# Altium PCB PCB1.PcbDoc
Units mil, origin at the board's own origin, x right, y up, seen from the top; angles counter-clockwise.
Board outline 4850 x 3985 mil, 2 copper layers (Top Layer, Bottom Layer); 38 components, 38 nets, 150 pads, 6 vias.
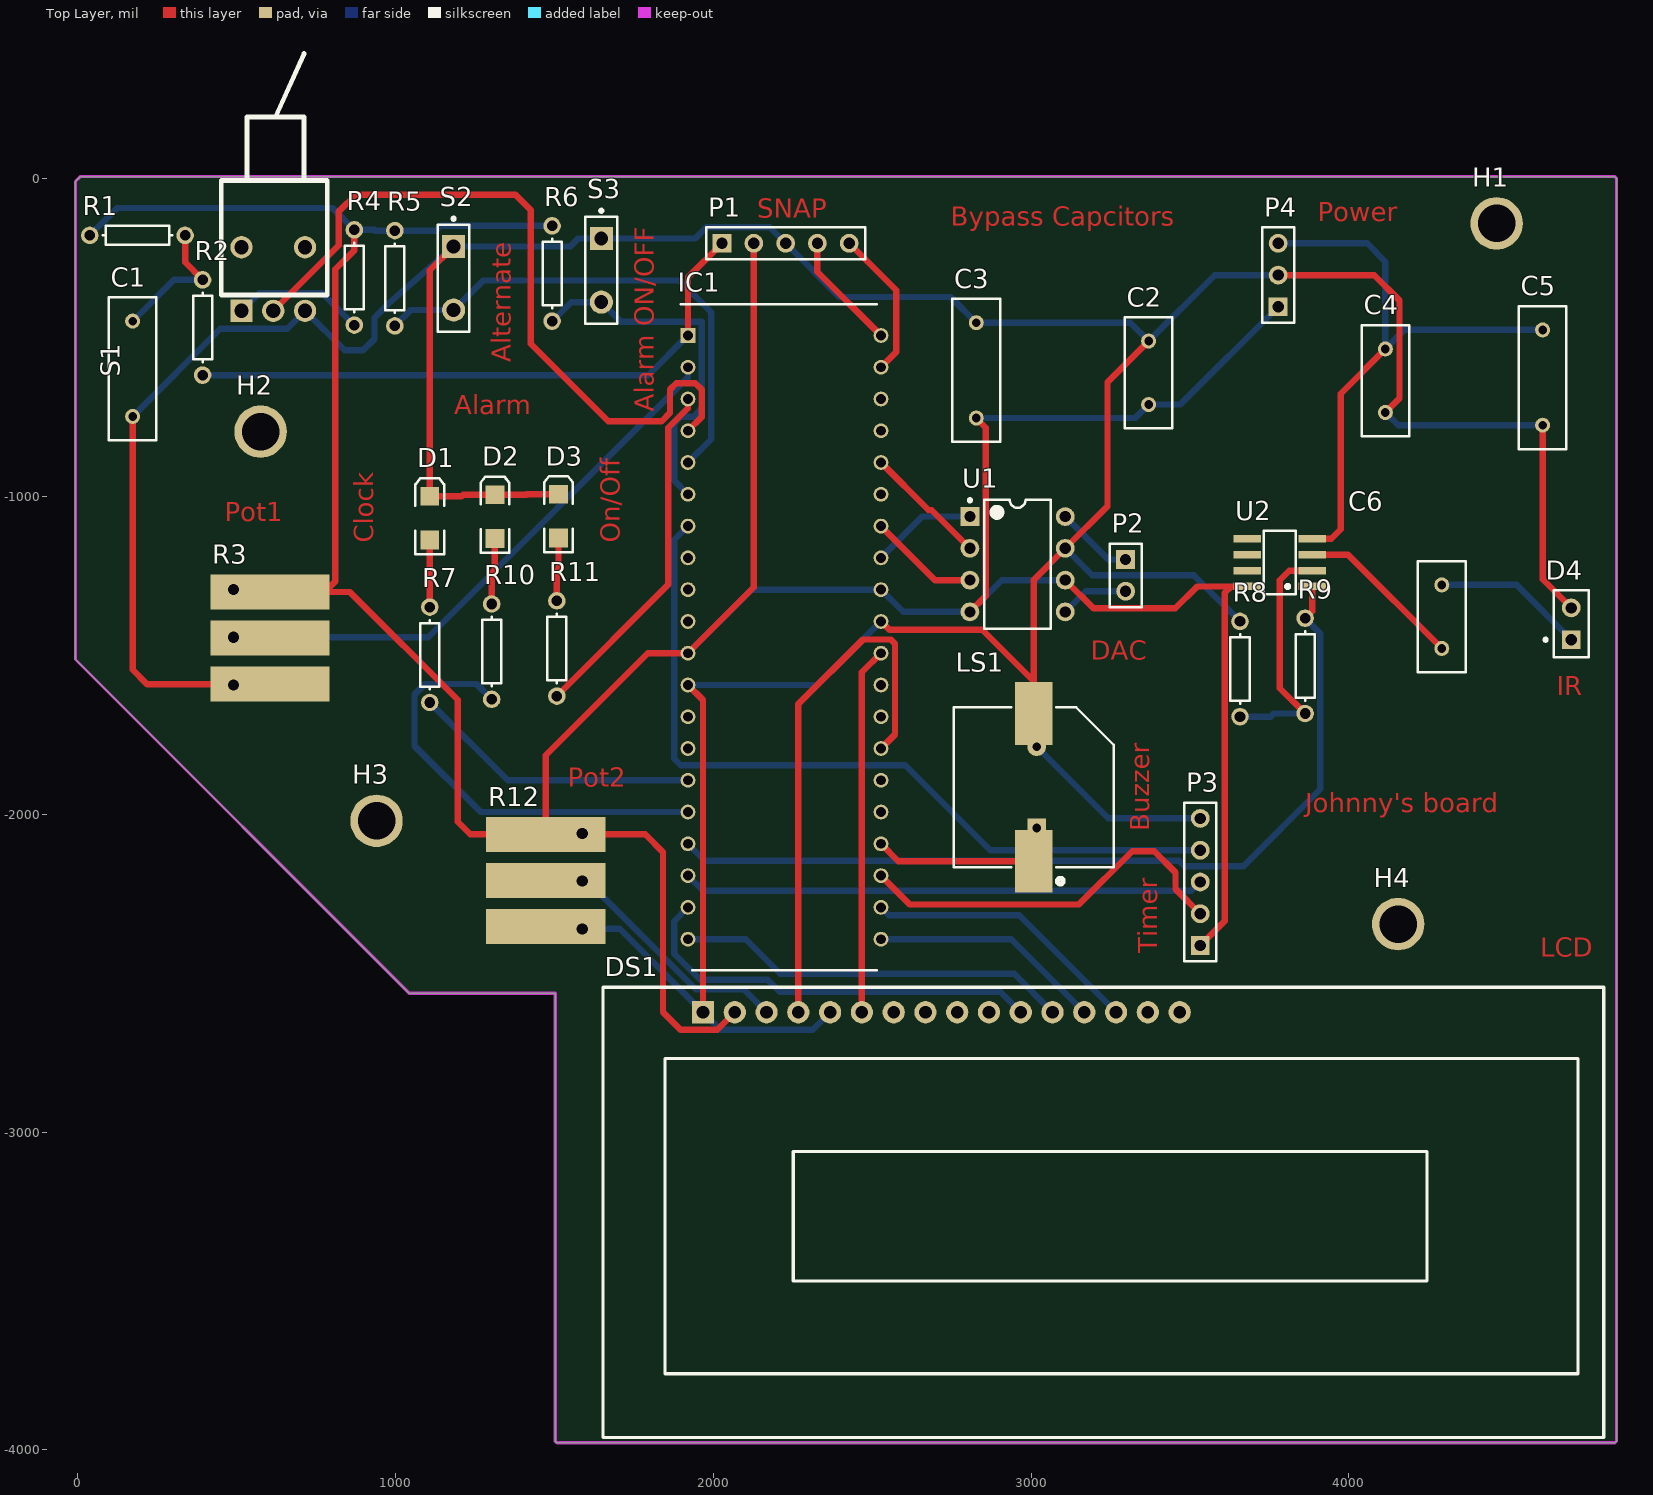
[diagram p0: Top Layer view]
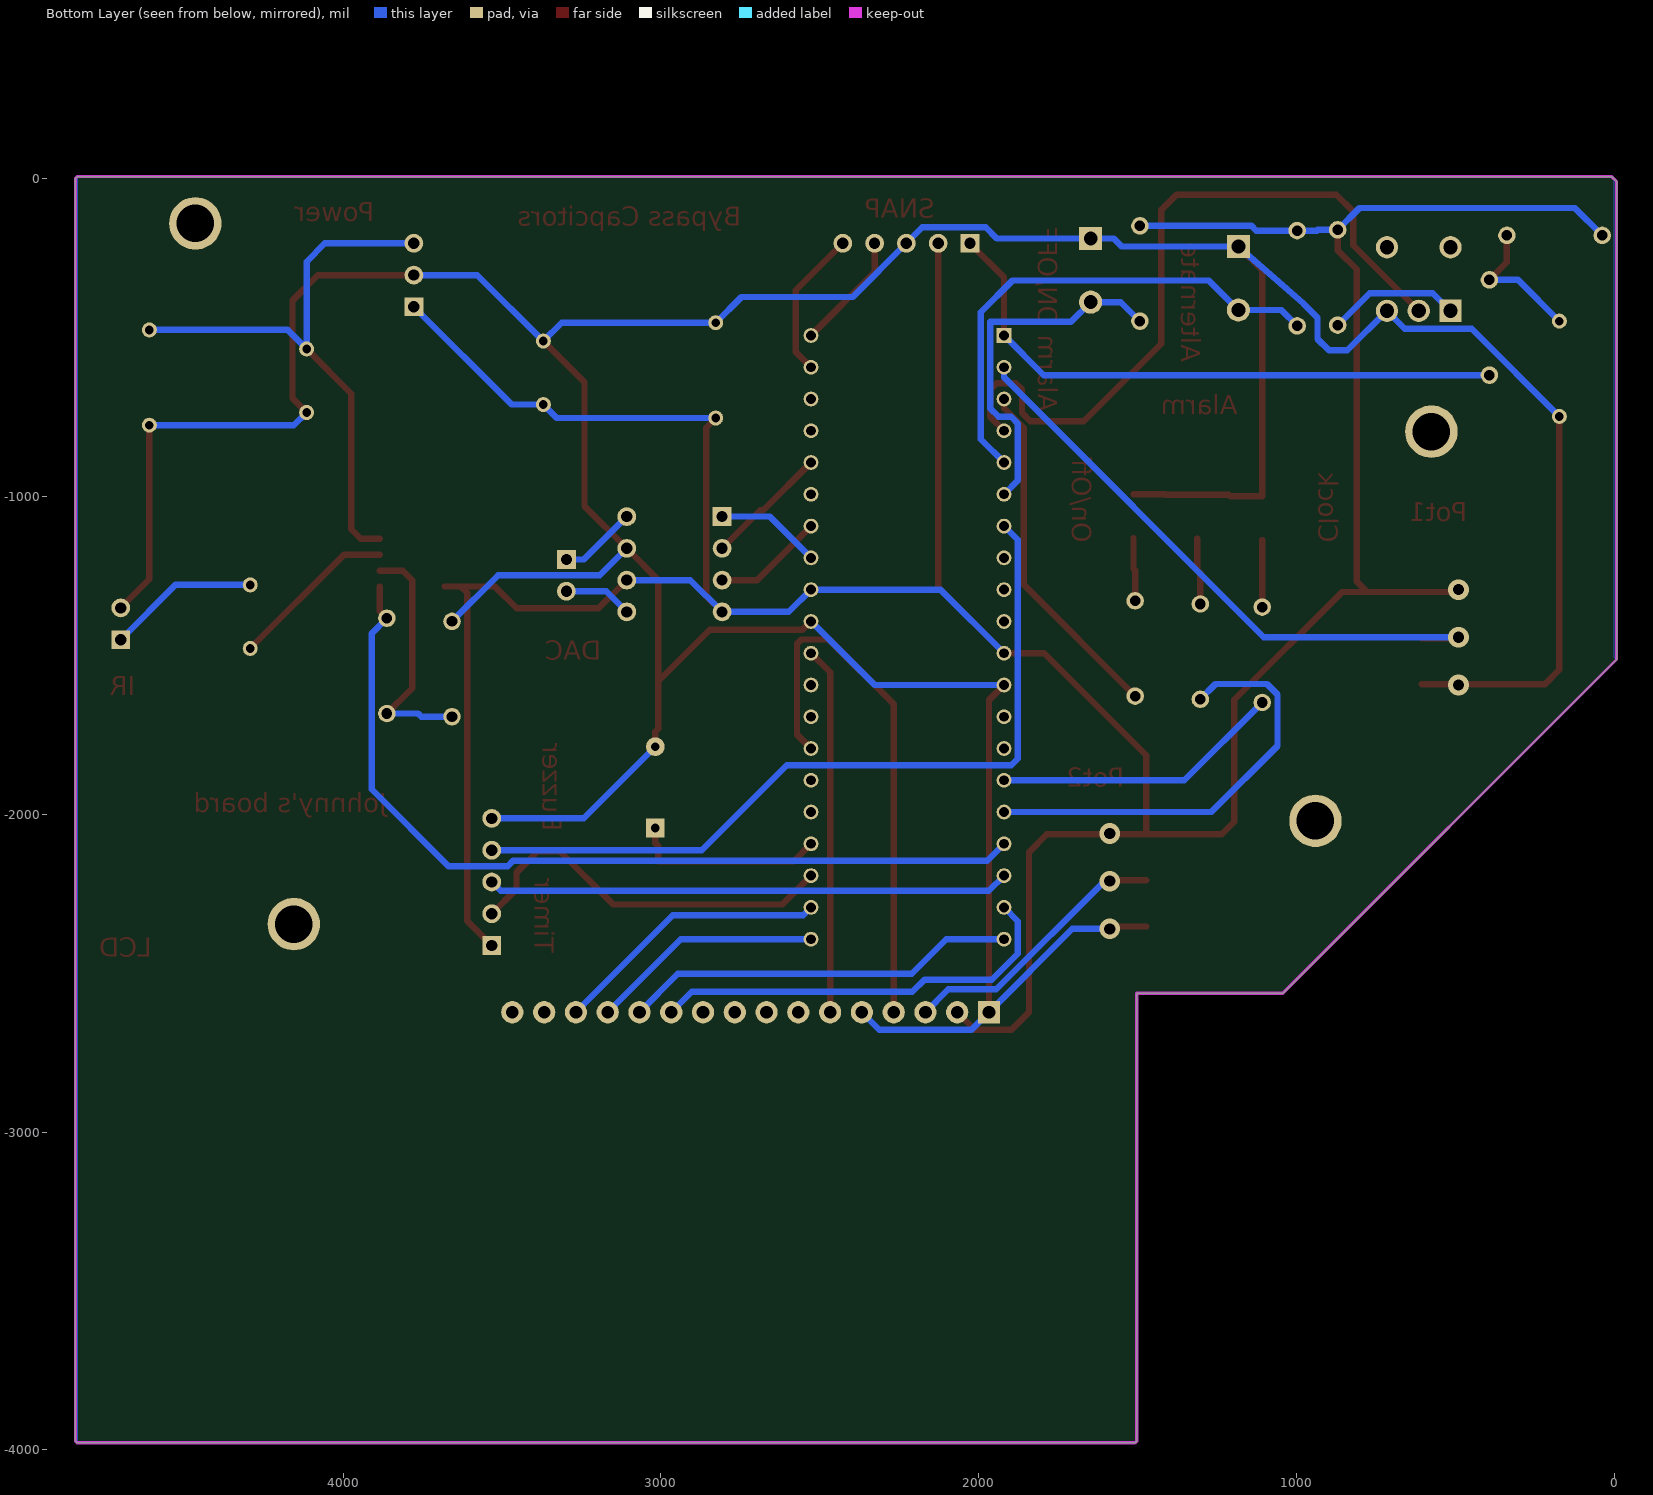
[diagram p1: Bottom Layer view, seen from below]

## Layer stack, top to bottom
Top Solder: solder mask 0.4, Solder Resist, Dk 3.5
Top Layer: signal copper 1.4
Dielectric 1: dielectric 12.6, FR-4, Dk 4.8
Bottom Layer: signal copper 1.4
Bottom Solder: solder mask 0.4, Solder Resist, Dk 3.5

## Board outline
1042.5,-2562.5 -7.5,-1512.5 -7.5,-7.5 7.5,7.5 4837.5,7.5 4842.5,2.5 4842.5,-3972.5 4837.5,-3977.5 1507.5,-3977.5 1502.5,-3972.5 1502.5,-2562.5

## Design rules (kind name [scope] priority, off if disabled: settings)
Clearance [All] p1: gap=10 ignorepadtopadclearanceinfootprint=FALSE except(0: Arc-Hole Track-Hole SMDPad-Hole THPad-Hole Via-Hole Fill-Hole Poly-Hole Region-Hole Text-Hole)
ComponentClearance [All] p1: gap=10 collisioncheckmode=3 verticalgap=0 showdistances=FALSE
PolygonConnect [All] p1: connectstyle=Relief reliefconductorwidth=10 reliefentries=4 polygonreliefangle="90 Angle" airgapwidth=10
RoutingVias [All] p1: holewidth=28 width=50 viastyle="Through Hole" minholewidth=28 minwidth=50 maxholewidth=28 maxwidth=50
SolderMaskExpansion [All] p1: expansion=4 istentingtop=FALSE
Width [All] p1: maxlimit=25 minlimit=10 preferedwidth=20 minimp=50.000000 maximp=50.000000 favimp=50.000000
29 further rules are at their usual default settings.

## Components (designator, comment, footprint, x,y, rotation, side; value= is the part's Value field where it differs from the comment)
C1 "Cap" RAD-0.3 172.5,-597.5 r90 top value=0.1uF
C2 "Cap Pol1" RAD-0.2 3370,-610 r90 top value=100uF
C3 "Cap" RAD-0.3 2827.5,-602.5 r270 top value=100nF
C4 "Cap Pol1" RAD-0.2 4115,-635 r90 top value=100uF
C5 "Cap" RAD-0.3 4610,-625 r90 top value=100nF
C6 "Cap Pol1" RAD-0.2 4292.5,-1377.5 r270 top value=270uF
D1 "LED2" 3.2X1.6X1.1 1107.5,-1067.5 r90 top
D2 "LED2" 3.2X1.6X1.1 1312.5,-1062.5 r90 top
D3 "LED2" 3.2X1.6X1.1 1512.5,-1061.4 r90 top
D4 "Photo Sen" PIN2 4700,-1450 r90 top
DS1 "LCD 44780" "OLED 16x2" 1967.5,-2622.5 r0 top
H1 "Hole 3mm" "Hole 3mm" 4465,-140 r0 top
H2 "Hole 3mm" "Hole 3mm" 575,-795 r0 top
H3 "Hole 3mm" "Hole 3mm" 940,-2020 r0 top
H4 "Hole 3mm" "Hole 3mm" 4155,-2345 r0 top
IC1 "PIC18F47K40-I_P" DIP1543W58P254L5175H635Q40N 2223.76,-1442.5 r0 top
LS1 "Buzzer" ABSM-1574 3008.05,-2146.83 r90 top
P1 "Header 5" HDR1X5 2027.5,-202.5 r0 top
P2 "Header 2" HDR1X2 3297.5,-1197.5 r270 top
P3 "Header 5" HDR1X5 3532.5,-2412.5 r90 top
P4 "Header 3" HDR1X3 3777.5,-402.5 r90 top
R1 "Res1" AXIAL-0.3 187.5,-177.5 r0 top value=10K
R2 "Res1" AXIAL-0.3 392.5,-467.5 r270 top value=410
R3 "RPot_7" CT2260-ND 605,-1517.5 r90 top value=2M
R4 "Res1" AXIAL-0.3 870,-310 r270 top value=1K
R5 "Res1" AXIAL-0.3 997.5,-312.5 r270 top value=1K
R6 "Res1" AXIAL-0.3 1492.5,-297.5 r270 top value=1K
R7 "Res1" AXIAL-0.3 1107.5,-1497.5 r270 top value=1K
R8 "Res1" AXIAL-0.3 3657.5,-1542.5 r90 top value=1K
R9 "Res1" AXIAL-0.3 3862.5,-1532.5 r270 top value=22K
R10 "Res1" AXIAL-0.3 1302.5,-1487.5 r270 top value=1K
R11 "Res1" AXIAL-0.3 1507.5,-1477.5 r270 top value=1K
R12 "RPot_7" CT2260-ND 1472.5,-2135 r270 top value=2M
S1 "SW-SPDT" "SW DPST jameco" 612.64,-416.89 r180 top
S2 "SW-PB" SPST-2 1182.5,-312.5 r270 top
S3 "SW-PB" SPST-2 1647.5,-287.5 r270 top
U1 "LT1661" DIP-8 2957.5,-1212.5 r0 top
U2 "LT1632CN8" SO08 3782.5,-1207.5 r90 top

## Footprints (in the part's own frame and the unit in brackets; to place one, negate y for a bottom-side part, rotate by r counter-clockwise, add the part's x,y. Pads: shape width x height; smd on the part's side, far side on the other; paste and mask are expansions set on the pad)
3.2X1.6X1.1 [mm] "SMT LED; 2 Flat Leads"
  rect 1.5x1.5 smd: 1(-1.75,0) 2(1.75,0)
  silkscreen extent -2.9,-1.15 3.2,1.15
ABSM-1574 [mm] "Magnetic Transducer Buzzer"
  rect 5x3 smd: 1(0,0) 2(11.8,0)
  rect 1.5x1.5 hole 0.7: 1A(2.65,-0.24)
  round 1.5 hole 0.7: 2A(9.15,-0.24)
  silkscreen extent -1.83,-6.4 12.3,6.4
AXIAL-0.3 [mm] "Axial Device, Thru-Hole; 2 Leads; 0.3 in Pin Spacing"
  round 1.4 hole 0.85: 1(-3.81,0) 2(3.81,0)
  silkscreen extent -2.77,-0.76 2.77,0.76
CT2260-ND [mil]
  rect 110x375 smd: 1(-72.5,0) 2(72.5,0) 3(217.5,0)
DIP1543W58P254L5175H635Q40N [mm]
  rect 1.184x1.184 hole 0.784: 1(-7.715,24.13)
  round 1.184 hole 0.784: 2(-7.715,21.59) 3(-7.715,19.05) 4(-7.715,16.51) 5(-7.715,13.97) 6(-7.715,11.43) 7(-7.715,8.89) 8(-7.715,6.35) 9(-7.715,3.81) 10(-7.715,1.27) 11(-7.715,-1.27) 12(-7.715,-3.81) 13(-7.715,-6.35) 14(-7.715,-8.89) 15(-7.715,-11.43) 16(-7.715,-13.97) 17(-7.715,-16.51) 18(-7.715,-19.05) 19(-7.715,-21.59) 20(-7.715,-24.13) 21(7.715,-24.13) 22(7.715,-21.59) 23(7.715,-19.05) 24(7.715,-16.51) 25(7.715,-13.97) 26(7.715,-11.43) 27(7.715,-8.89) 28(7.715,-6.35) 29(7.715,-3.81) 30(7.715,-1.27) 31(7.715,1.27) 32(7.715,3.81) 33(7.715,6.35) 34(7.715,8.89) 35(7.715,11.43) 36(7.715,13.97) 37(7.715,16.51) 38(7.715,19.05) 39(7.715,21.59) 40(7.715,24.13)
  silkscreen extent -8.31,-26.61 7.37,26.61, body extent -7.86,-25.88 7.86,25.88, height 6.35
DIP-8 [mm] "DIP; 8 Leads; Row Spacing 7.62 mm; Pitch 2.54 mm"
  rect 1.5x1.5 hole 0.9: 1(-3.81,3.81)
  round 1.5 hole 0.9: 2(-3.81,1.27) 3(-3.81,-1.27) 4(-3.81,-3.81) 5(3.81,-3.81) 6(3.81,-1.27) 7(3.81,1.27) 8(3.81,3.81)
  silkscreen extent -3.93,-5.15 2.65,5.23, body extent -3.6,-5.15 3.6,5.15, height 5.08
HDR1X2 [mm] "Connector; Header; 2 Position"
  rect 1.5x1.5 hole 0.9: 1(0,0)
  round 1.5 hole 0.9: 2(2.54,0)
  silkscreen extent -1.27,-1.27 3.81,1.27
HDR1X3 [mm] "Connector; Header; 3 Position"
  rect 1.5x1.5 hole 0.9: 1(0,0)
  round 1.5 hole 0.9: 2(2.54,0) 3(5.08,0)
  silkscreen extent -1.27,-1.27 6.35,1.27
HDR1X5 [mm] "Connector; Header; 5 Position"
  rect 1.5x1.5 hole 0.9: 1(0,0)
  round 1.5 hole 0.9: 2(2.54,0) 3(5.08,0) 4(7.62,0) 5(10.16,0)
  silkscreen extent -1.27,-1.27 11.43,1.27
"Hole 3mm" [mil]
  round 165 hole 118.11: 1(0,0)
"OLED 16x2" [mil]
  rect 70x70 hole 40: 1(0,0)
  round 70 hole 40: 2(100,0) 3(200,0) 4(300,0) 5(400,0) 6(500,0) 7(600,0) 8(700,0) 9(800,0) 10(900,0) 11(1000,0) 12(1100,0) 13(1200,0) 14(1300,0) 15(1400,0) 16(1500,0)
  silkscreen extent -315,-1339 2835,79
PIN2 [mm] "Photosensitive Diode; 2 Leads"
  rect 1.5x1.5 hole 0.9: 1(0,0)
  round 1.5 hole 0.9: 2(2.54,0)
  silkscreen extent -1.4,-1.4 3.94,2.17
RAD-0.2 [mm] "Radial Cap, Thru-Hole; 2 Leads; 0.2 in Pin Spacing"
  round 1.2 hole 0.7: 1(-2.54,0) 2(2.54,0)
  silkscreen extent -4.44,-1.91 4.45,1.91
RAD-0.3 [mm] "Radial Cap, Thru-Hole; 2 Leads; 0.3 in Pin Spacing"
  round 1.2 hole 0.7: 1(-3.81,0) 2(3.81,0)
  silkscreen extent -5.71,-1.91 5.71,1.91
SO08 [mm]
  rect 0.6x2.2 smd: 1(-1.905,-2.6) 2(-0.635,-2.6) 3(0.635,-2.6) 4(1.905,-2.6) 5(1.905,2.6) 6(0.635,2.6) 7(-0.635,2.6) 8(-1.905,2.6)
  silkscreen extent -2.54,-1.27 2.54,1.27
SPST-2 [mm] "Switch; 2 Leads"
  rect 1.85x1.85 hole 1.1: 1(-2.54,0)
  round 1.85 hole 1.1: 2(2.54,0)
  silkscreen extent -4.89,-1.27 4.28,1.27
"SW DPST jameco" [mil]
  rect 70x70 hole 45: 1(97.64,-1.89)
  round 70 hole 45: 2(-2.36,-1.89) 3(-102.36,-1.89) 4(-102.36,-201.89) 5(97.64,-201.89)
  silkscreen extent -172,-812 162,-52

## Part data
C1 C3 C5: "Capacitor", LatestRevisionDate=17-Jul-2002, LatestRevisionNote="Re-released for DXP Platform.", PackageDescription="Radial Cap, Thru-Hole; 2 Leads; 0.3 in Pin Spacing", PackageReference=RAD-0.3, Published=8-Jun-2000, Publisher="Altium Limited"
C2 C4 C6: "Polarized Capacitor (Radial)", LatestRevisionDate=17-Jul-2002, LatestRevisionNote="Re-released for DXP Platform.", PackageDescription="Polarized Capacitor (Radial); 2 Leads", PackageReference=RB7.6-15, Published=8-Jun-2000, Publisher="Altium Limited"
D1 D2 D3: "Typical RED, GREEN, YELLOW, AMBER GaAs LED", LatestRevisionDate=17-Jul-2002, LatestRevisionNote="Re-released for DXP Platform.", PackageDescription="SM LED; 2 Flat Leads", PackageReference=3.2X1.6X1.1, PackageVersion=Feb-2002, Published=8-Jun-2000, Publisher="Altium Limited"
D4: "Photosensitive Diode", LatestRevisionDate=17-Jul-2002, LatestRevisionNote="Re-released for DXP Platform.", PackageReference=PIN2, Published=24-Mar-1999, Publisher="Altium Limited"
IC1: "Integrated Circuit", Manufacturer_Name=Microchip, Manufacturer_Part_Number=PIC18F47K40-I/P, Mouser Part Number=579-PIC18F47K40-I/P, RS Part Number=1262152P, Datasheet Link=https://componentsearchengine.com/Datasheets/2/PIC18F47K40-I_P.pdf, Height=6.35mm, Mouser Price/Stock=https://www.mouser.com/Search/Refine.aspx?Keyword=579-PIC18F47K40-I%2FP, RS Price/Stock=http://uk.rs-online.com/web/p/products/1262152P
LS1: "Magnetic Transducer Buzzer", ComponentLink1Description="Manufacturer Link", ComponentLink1URL=http://www.megastar.com/linecard/buzzmode/index.php, DatasheetVersion=17-Dec-2003, LatestRevisionDate=17-Dec-2003, LatestRevisionNote="Schematic revised, PCB Footprint replaced.", PackageDescription="Magnetic Transducer Buzzer", PackageReference=ABSM-1574, Published=24-Mar-1999, Publisher="Altium Limited"
P1 P3: "Header, 5-Pin", LatestRevisionDate=17-Jul-2002, LatestRevisionNote="Re-released for DXP Platform.", Publisher="Altium Limited"
P2: "Header, 2-Pin", LatestRevisionDate=17-Jul-2002, LatestRevisionNote="Re-released for DXP Platform.", Publisher="Altium Limited"
P4: "Header, 3-Pin", LatestRevisionDate=17-Jul-2002, LatestRevisionNote="Re-released for DXP Platform.", Publisher="Altium Limited"
R1 R2 R4 R5 R6 R7 R8 R9 R10 R11: "Resistor", LatestRevisionDate=17-Jul-2002, LatestRevisionNote="Re-released for DXP Platform.", PackageDescription="Axial Device, Thru-Hole; 2 Leads; 0.3 in Pin Spacing", PackageReference=AXIAL-0.3, Published=8-Jun-2000, Publisher="Altium Limited"
R3 R12: library part RPot_4, "Potentiometer", LatestRevisionDate=17-Jul-2002, LatestRevisionNote="Re-released for DXP Platform.", PackageDescription="Variable Resistor, Thru-Hole; 3 Leads", PackageReference=VR5, Published=8-Jun-2000, Publisher="Altium Limited", Set Position=0.5, Sim Note="Enter the Resistance value and the set point into parameter fields."
S1: "SPDT Subminiature Toggle Switch, Right Angle Mounting, Vertical Actuation", ComponentLink1Description="Manufacturer Link", ComponentLink1URL=http://www.apem.com, DatasheetVersion=05-Dec-2000, LatestRevisionDate=17-Dec-2003, LatestRevisionNote="Schematic revised, PCB Footprint replaced.", PackageDescription="Switch; 4 Leads", PackageReference=TL36WW15050, Published=24-Mar-1999, Publisher="Altium Limited"
S2 S3: "Switch", LatestRevisionDate=17-Jul-2002, LatestRevisionNote="Re-released for DXP Platform.", PackageDescription="Switch; 2 Leads", PackageReference=SPST-2, Published=24-Mar-1999, Publisher="Altium Limited"
U2: "45MHz, 45V/µs, Dual Rail-to-Rail Input and Output Precision Operational Amplifier", ComponentLink1Description="Manufacturer Link", ComponentLink1URL=http://www.linear.com/, ComponentLink2Description=Datasheet, ComponentLink2URL=http://www.linear.com/pc/downloadDocument.do?navId=H0,C1,C1154,C1009,C1022,P1642,D3055, DatasheetVersion=1996, LatestRevisionDate=29-May-2009, LatestRevisionNote="Component Body Added.", Note=1455, PackageDescription="DIP, Plastic, 8-Pin, Row Spacing 7.62 mm, Pitch 2.54 mm", PackageReference=N8, PackageVersion="N8 1002", Published=8-Jun-2000, Publisher="Altium Limited"

## Via types
v1: diameter 65, hole 35, Top Layer to Bottom Layer, 6 vias

## Nets (pads, with @x,y where several pads share a name; then routed paths per layer and width w, separated by ;. In a path a pad name is that pad's centre, name@x,y a point inside that pad or via, vN(x,y) a via of type N, cw(c..) or ccw(c..) an arc to the next point about the centre after c; other vN are vias at no path point)
+5: C2.1 C3.2 DS1.2 IC1.11 IC1.32 P1.2 P3.1 P4.1 R1.1 R3.3 R4.1 R5.1 R6.1 R12.1 U1.4 U1.6 U2.8 | length 12495.1
  Top Layer w20: v1(490,-1292.5) 490,-1300 R3.3 R3.3@777.5,-1300 ; R4.1 870,-225 810.5,-284.5 810.5,-1267 R3.3@777.5,-1300 ; DS1.2 2012.5,-2677.5 1896.5,-2677.5 1841.5,-2622.5 1841.5,-2118.5 1785.5,-2062.5 R12.1 ; P1.2 2127.5,-1285.02 IC1.11 1793.5,-1492.5 1472.5,-1813.5 R12.1 ; U1.4 2857.5,-1312.5 2857.5,-782.5 C3.2 ; U1.6 3196.5,-1351.5 3453.5,-1351.5 3522.5,-1282.5 3629.5,-1282.5 ; P3.1 3609.5,-2335.5 3609.5,-1302.5 3629.5,-1282.5 ; U2.8 3629.5,-1282.5 ; R3.3@777.5,-1300 856,-1300 1195.5,-1639.5 1195.5,-2022.5 1235.5,-2062.5 R12.1
  Bottom Layer w20: R1.1 123.5,-91.5 801.5,-91.5 R4.1 932.5,-160 935,-162.5 R5.1 1126.5,-162.5 1141.5,-147.5 R6.1 ; IC1.11 2120.02,-1292.5 IC1.32 2597.5,-1362.5 U1.4 2907.5,-1262.5 U1.6 ; C3.2 3327.5,-752.5 C2.1 3470,-710 P4.1
  other v1: 1587.5,-2060
-5: C4.2 C5.2 P4.3 U2.4 | length 1883.9
  Top Layer w20: U2.4 3944.5,-1132.5 3974.5,-1102.5 3974.5,-675.5 C4.2
  Bottom Layer w20: P4.3 4057.5,-202.5 4115,-260 C4.2 4175,-475 C5.2
GND: C1.1 C2.2 C3.1 C4.1 C5.1 D1.2 D2.2 D3.2 D4.2 DS1.1 DS1.5 IC1.12 IC1.31 LS1.2 LS1.2A P1.3 P3.5 P4.2 R3.1 R8.2 R12.3 S1.3 S2.1 S3.1 U1.7 | length 14644.1
  Top Layer w20: C1.1 172.5,-1545 217.5,-1590 R3.1 ; S2.1 1107.5,-287.5 D1.2 1207.5,-998.6 1212.5,-993.6 D2.2 1411.5,-993.6 1412.6,-992.5 D3.2 ; R12.3 1587.5,-2352.5 v1(1587.5,-2360) ; IC1.12 1967.5,-1639.98 DS1.1 ; IC1.31 2554.19,-1419.19 2846.19,-1419.19 3008.05,-1581.05 ; LS1.2A 3017.5,-1739.5 3008.05,-1730.05 LS1.2 3008.05,-1581.05 ; C2.2 3240.5,-639.5 3240.5,-1029.5 U1.7 3008.05,-1261.95 3008.05,-1581.05 ; P4.2 4079.5,-302.5 4159.5,-382.5 4159.5,-690.5 C4.1 ; C5.1 4610,-1260 D4.2
  Bottom Layer w20: C1.1 448.5,-471.5 658.5,-471.5 S1.3 839.5,-539.5 897.5,-539.5 933.5,-503.5 933.5,-436.5 977.5,-392.5 S2.1 1549.5,-212.5 1574.5,-187.5 S3.1 1942.5,-187.5 1977.5,-152.5 2177.5,-152.5 P1.3 2396.5,-371.5 2746.5,-371.5 C3.1 3312.5,-452.5 C2.2 3577.5,-302.5 P4.2 ; v1(1587.5,-2360) 1705,-2360 DS1.1 2022.5,-2677.5 2312.5,-2677.5 DS1.5 ; IC1.12 2327.5,-1592.5 IC1.31 ; LS1.2A 3243.41,-2012.5 P3.5 ; U1.7 3192.5,-1247.5 3512.5,-1247.5 R8.2 ; C4.1 4155,-775 C5.1
  other v1: 490,-1592.5
NetC1_2: C1.2 R1.2 R2.1 | length 436.6
  Top Layer w20: R1.2 337.5,-262.5 R2.1
  Bottom Layer w20: C1.2 302.5,-317.5 R2.1
NetC6_1: C6.1 D4.1 | length 479
  Bottom Layer w20: C6.1 4527.5,-1277.5 D4.1
NetC6_2: C6.2 U2.3 | length 529.8
  Top Layer w20: U2.3 3997.5,-1182.5 C6.2
NetD1_1: D1.1 R7.1 | length 211.1
  Top Layer w20: R7.1 D1.1
NetD2_1: D2.1 R10.1 | length 210.2
  Top Layer w20: R10.1 1302.5,-1239.5 1312.5,-1229.5 D2.1
NetD3_1: D3.1 R11.1 | length 199.3
  Top Layer w20: R11.1 1507.5,-1231.5 1512.5,-1226.5 D3.1
NetDS1_3: DS1.3 R12.2 | length 866.9
  Top Layer w20: R12.2 1585,-2207.5 v1(1587.5,-2210)
  Bottom Layer w20: v1(1587.5,-2210) 1604,-2210 1944.5,-2550.5 2095.5,-2550.5 DS1.3
NetDS1_4: DS1.4 IC1.27 | length 1712
  Top Layer w20: DS1.4 2267.5,-1652.5 2470.81,-1449.19 2558.19,-1449.19 2571.5,-1462.5 2571.5,-1748.5 IC1.27
NetDS1_6: DS1.6 IC1.30 | length 1154.9
  Top Layer w20: DS1.6 2467.5,-1552.5 IC1.30
NetDS1_11: DS1.11 IC1.19 | length 1331.2
  Bottom Layer w20: IC1.19 1876.5,-2336.02 1876.5,-2438.5 1958.5,-2520.5 2170.5,-2520.5 2208.5,-2558.5 2903.5,-2558.5 DS1.11
NetDS1_12: DS1.12 IC1.20 | length 1242.7
  Bottom Layer w20: IC1.20 2102.03,-2392.5 2211.03,-2501.5 2946.5,-2501.5 DS1.12
NetDS1_13: DS1.13 IC1.21 | length 735.3
  Bottom Layer w20: IC1.21 2937.5,-2392.5 DS1.13
NetDS1_14: DS1.14 IC1.22 | length 876.7
  Bottom Layer w20: IC1.22 2552.5,-2317.5 2962.5,-2317.5 DS1.14
NetIC1_1: IC1.1 P1.1 R2.2 | length 1913.8
  Top Layer w20: IC1.1 1920.02,-309.98 P1.1
  Bottom Layer w20: R2.2 1795.02,-617.5 IC1.1
NetIC1_2: IC1.2 R3.2 | length 1918.6
  Top Layer w20: v1(490,-1442.5) 490,-1445 R3.2
  Bottom Layer w20: v1(490,-1442.5) 1102.5,-1442.5 1920.02,-624.98 IC1.2
NetIC1_3: IC1.3 R11.2 | length 1105.9
  Top Layer w20: R11.2 1858.5,-1276.5 1858.5,-783.5 1920.02,-721.98 IC1.3
NetIC1_4: IC1.4 S1.2 | length 2353
  Top Layer w20: S1.2 821.5,-208.5 821.5,-102.5 874.5,-49.5 1377.5,-49.5 1425.5,-97.5 1425.5,-518.5 1669.5,-762.5 1837.07,-762.5 1863.5,-736.07 1863.5,-662.5 1883.5,-642.5 1943.5,-642.5 1963.5,-662.5 1963.5,-749.02 IC1.4
NetIC1_5: IC1.5 R5.2 S2.2 | length 1600
  Bottom Layer w20: R5.2 1047.5,-412.5 S2.2 1275.5,-319.5 1893.64,-319.5 1993.33,-419.19 1993.33,-819.19 IC1.5
NetIC1_6: IC1.6 R6.2 S3.2 | length 1141.9
  Bottom Layer w20: R6.2 1552.5,-387.5 S3.2 1709.19,-449.19 1963.33,-449.19 1963.33,-722.5 1937.33,-748.5 1897.5,-748.5 1876.5,-769.5 1876.5,-948.98 IC1.6
NetIC1_7: IC1.7 P3.4 | length 2525.3
  Bottom Layer w20: IC1.7 1876.5,-1136.02 1876.5,-1824.5 1897.5,-1845.5 2604.5,-1845.5 2871.5,-2112.5 P3.4
NetIC1_15: IC1.15 R7.2 | length 914
  Bottom Layer w20: R7.2 1352.5,-1892.5 IC1.15
NetIC1_16: IC1.16 R10.2 | length 1385.2
  Bottom Layer w20: R10.2 1254.5,-1589.5 1092.5,-1589.5 1059.5,-1622.5 1059.5,-1784.5 1267.5,-1992.5 IC1.16
NetIC1_17: IC1.17 R9.1 U2.1 | length 2786.9
  Top Layer w20: R9.1 3884.86,-1360.14 U2.1
  Bottom Layer w20: IC1.17 1973.02,-2145.5 3465.5,-2145.5 3482.5,-2162.5 3668.5,-2162.5 3910.5,-1920.5 3910.5,-1430.5 R9.1
NetIC1_18: IC1.18 P3.3 | length 1644
  Bottom Layer w20: IC1.18 1968.02,-2240.5 3504.5,-2240.5 P3.3
NetIC1_23: IC1.23 P3.2 | length 1224.3
  Top Layer w20: IC1.23 2618.5,-2283.5 3150.5,-2283.5 3318.5,-2115.5 3387.5,-2115.5 3454.5,-2182.5 3454.5,-2234.5 P3.2
NetIC1_24: IC1.24 LS1.1 LS1.1A | length 611.3
  Top Layer w20: IC1.24 2581.83,-2146.83 LS1.1 3008.05,-2099.5 3017.5,-2090.05 LS1.1A
NetIC1_33: IC1.33 U1.1 | length 333.8
  Bottom Layer w20: IC1.33 2657.5,-1062.5 U1.1
NetIC1_34: IC1.34 U1.3 | length 350.4
  Top Layer w20: IC1.34 2697.5,-1262.5 U1.3
NetIC1_36: IC1.36 U1.2 | length 391.8
  Top Layer w20: IC1.36 2677.5,-1042.5 2687.5,-1042.5 U1.2
NetIC1_39: IC1.39 P1.5 | length 471.2
  Top Layer w20: P1.5 2575.5,-350.5 2575.5,-544.5 IC1.39
NetIC1_40: IC1.40 P1.4 | length 372.8
  Top Layer w20: P1.4 2327.5,-292.5 IC1.40
NetP2_1: P2.1 U1.8 | length 245.9
  Bottom Layer w20: U1.8 3242.5,-1197.5 P2.1
NetP2_2: P2.2 U1.5 | length 216.9
  Bottom Layer w20: U1.5 3172.5,-1297.5 P2.2
NetR4_2: R4.2 S1.1 | length 419.6
  Bottom Layer w20: S1.1 570.5,-359.5 769.5,-359.5 R4.2
NetR8_1: R8.1 R9.2 U2.2 | length 777.1
  Top Layer w20: R9.2 3782.5,-1602.5 3782.5,-1262.5 3812.5,-1232.5 U2.2
  Bottom Layer w20: R8.1 3754.5,-1692.5 3764.5,-1682.5 R9.2
pads on no net: DS1.7 DS1.8 DS1.9 DS1.10 DS1.15 DS1.16 H1.1 H2.1 H3.1 H4.1 IC1.8 IC1.9 IC1.10 IC1.13 IC1.14 IC1.25 IC1.26 IC1.28 IC1.29 IC1.35 IC1.37 IC1.38 S1.4 S1.5 U2.5 U2.6 U2.7

## Polygon pours and split planes (outlines as drawn)
GND on Bottom Layer "NONET_L02_P002" (hatched Horizontal grid 20 track 8, shelved, pour order 2): 7.5,7.5 4837.5,7.5 4837.5,-3977.5 4832.5,-3972.5 1502.5,-3972.5 1502.5,-2562.5 1042.5,-2562.5 -7.5,-1512.5 0,-1505 0,0
+5 on Top Layer "NONET_L01_P004" (hatched Horizontal grid 20 track 8, shelved, pour order 4): 7.5,7.5 -7.5,-7.5 -7.5,-1512.5 1042.5,-2562.5 1502.5,-2562.5 1502.5,-3972.5 1505,-3975 4840,-3975 4840,5 4837.5,7.5

## Keep-outs
Keep-Out Layer:
  the board outline again, w10

## Other copper
Top Layer:
  text "SNAP" at 2137.5,-122.5 h60
  text "Power" at 3902.5,-132.5 h60
  text "Bypass Capcitors" at 2747.5,-147.51 h60
  text "Alternate" at 1362.5,-577.5 h60 r90
  text "Alarm ON/OFF" at 1812.5,-732.5 h60 r90
  text "Alarm" at 1185,-740 h60
  text "Pot1" at 462.5,-1077.5 h60
  text "Clock" at 930,-1145 h60 r90
  text "On/Off" at 1705,-1145 h60 r90
  text "DAC" at 3187.5,-1512.5 h60
  text "IR" at 4655,-1625 h60
  text "Pot2" at 1542.5,-1912.5 h60
  text "Johnny's board" at 3862.5,-1992.51 h60
  text "Buzzer" at 3372.5,-2052.5 h60 r90
  text "Timer" at 3397.5,-2437.5 h60 r90
  text "LCD" at 4602.5,-2447.5 h60